# Altium PCB TFT_4.0-inch_OTM8009A_Pcb.PcbDoc
Units mil, origin at the board's own origin, x right, y up, seen from the top; angles counter-clockwise.
Board outline 3937.01 x 2265 mil, 2 copper layers (Top Layer, Bottom Layer); 23 components, 40 nets, 134 pads, 17 vias.
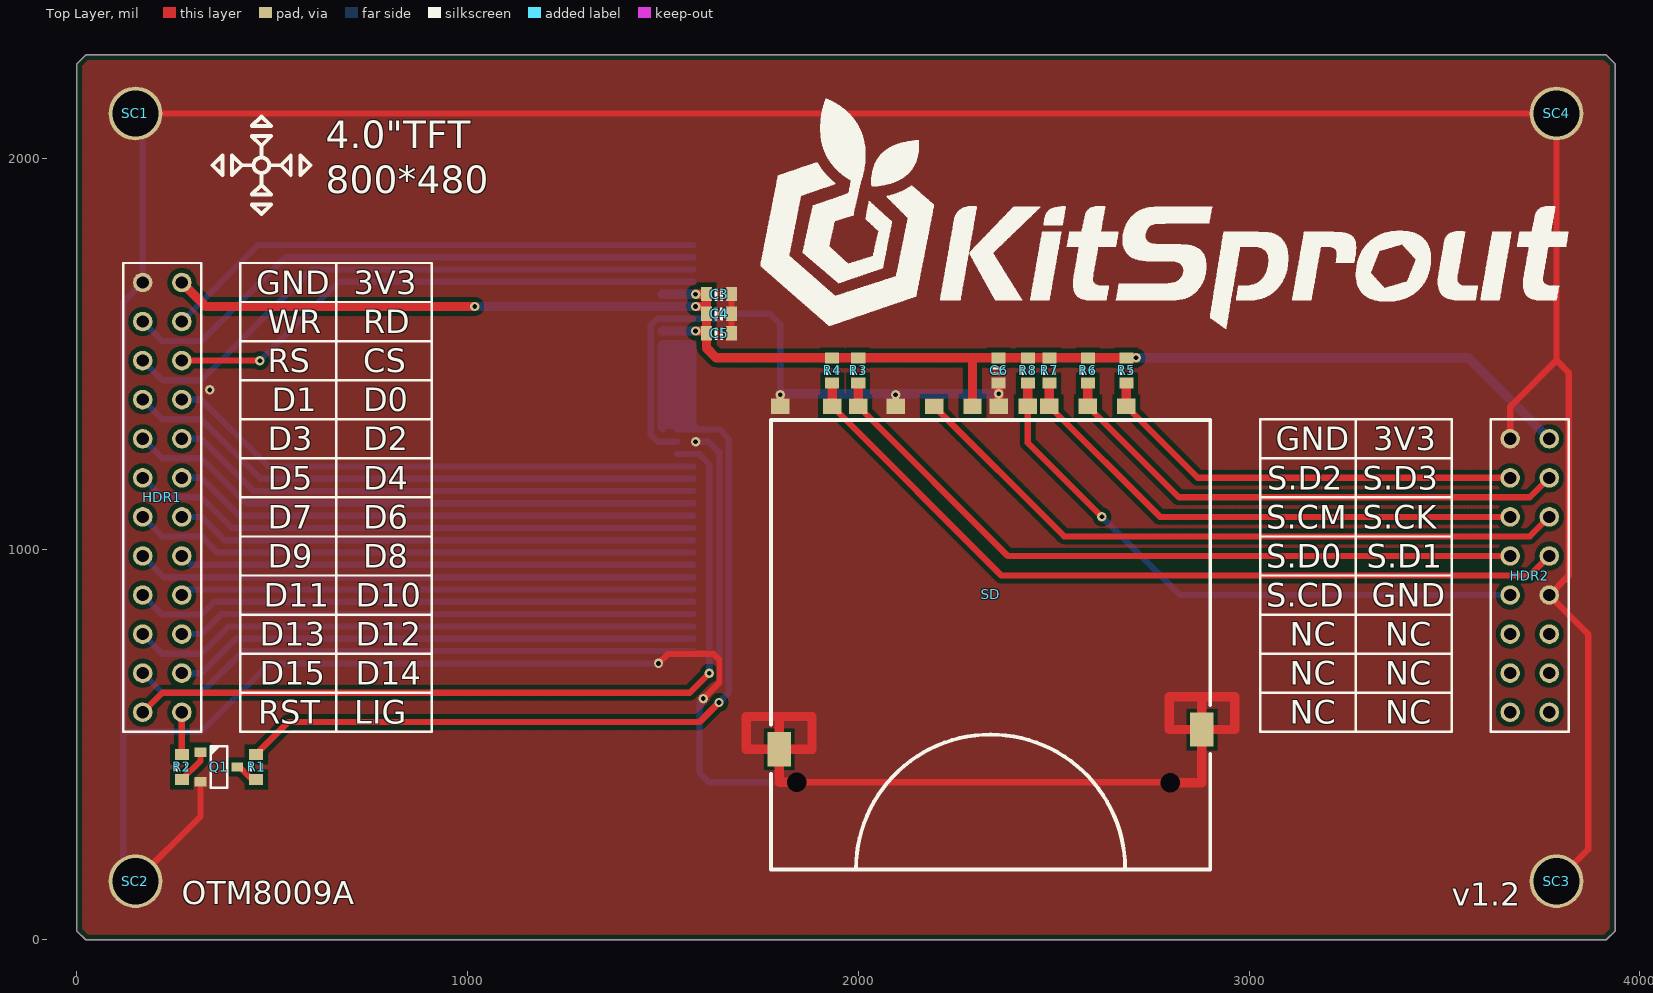
[diagram p0: Top Layer view]
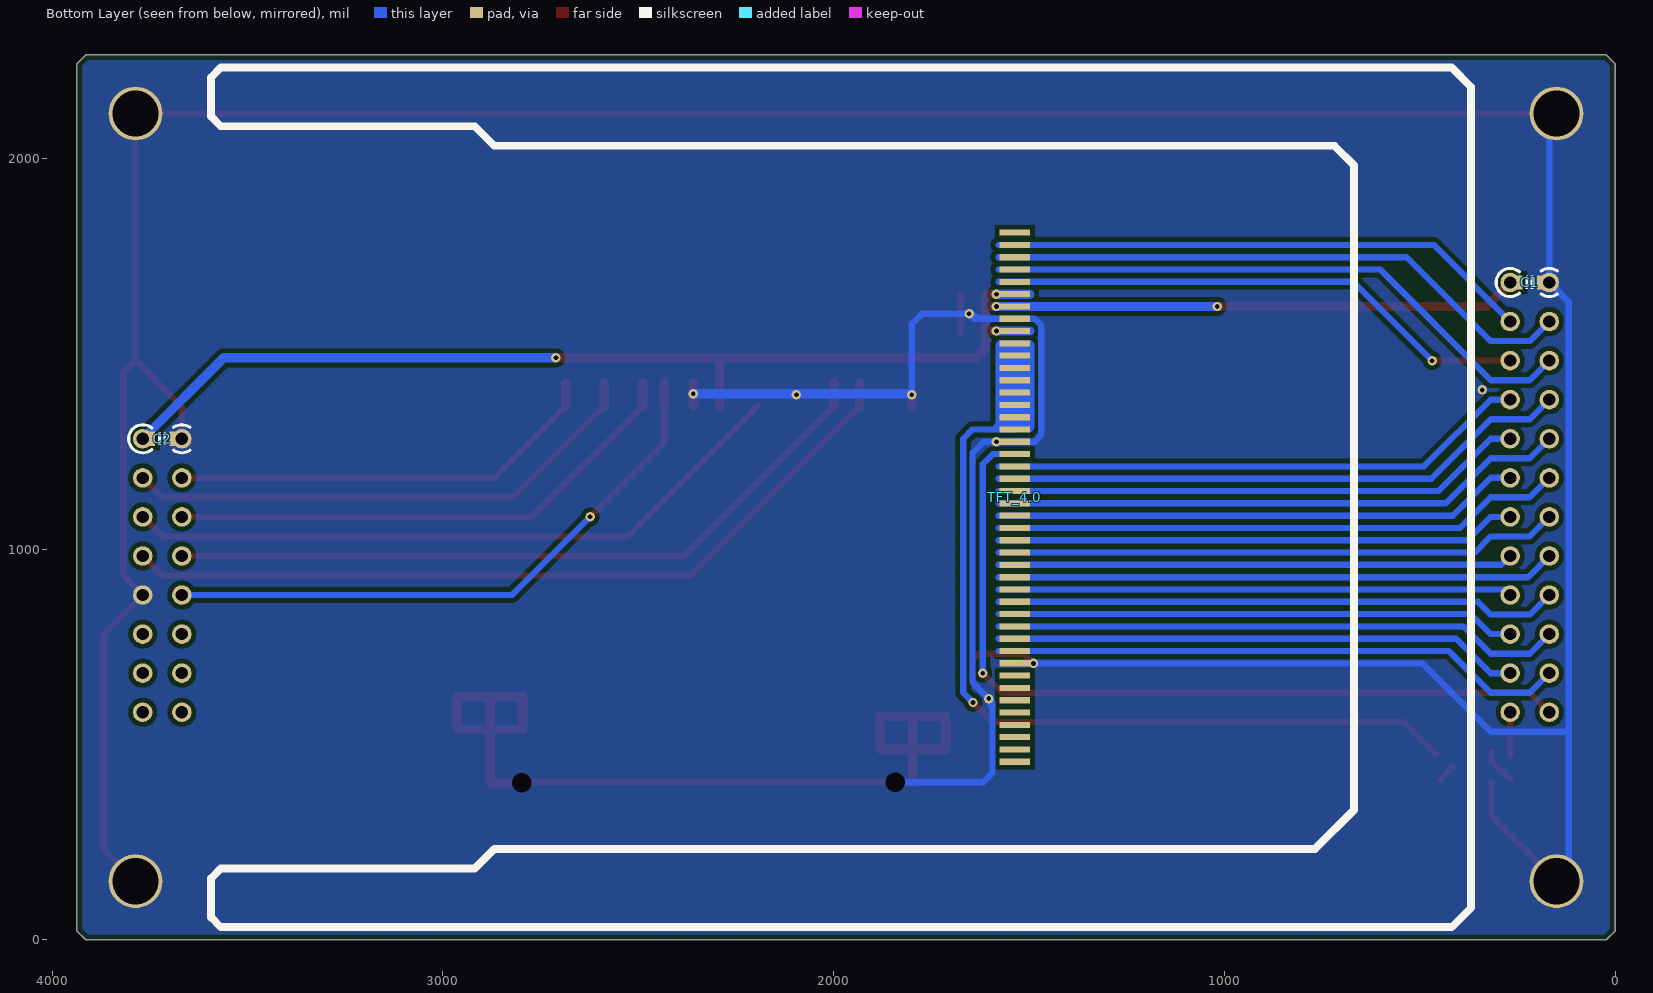
[diagram p1: Bottom Layer view, seen from below]
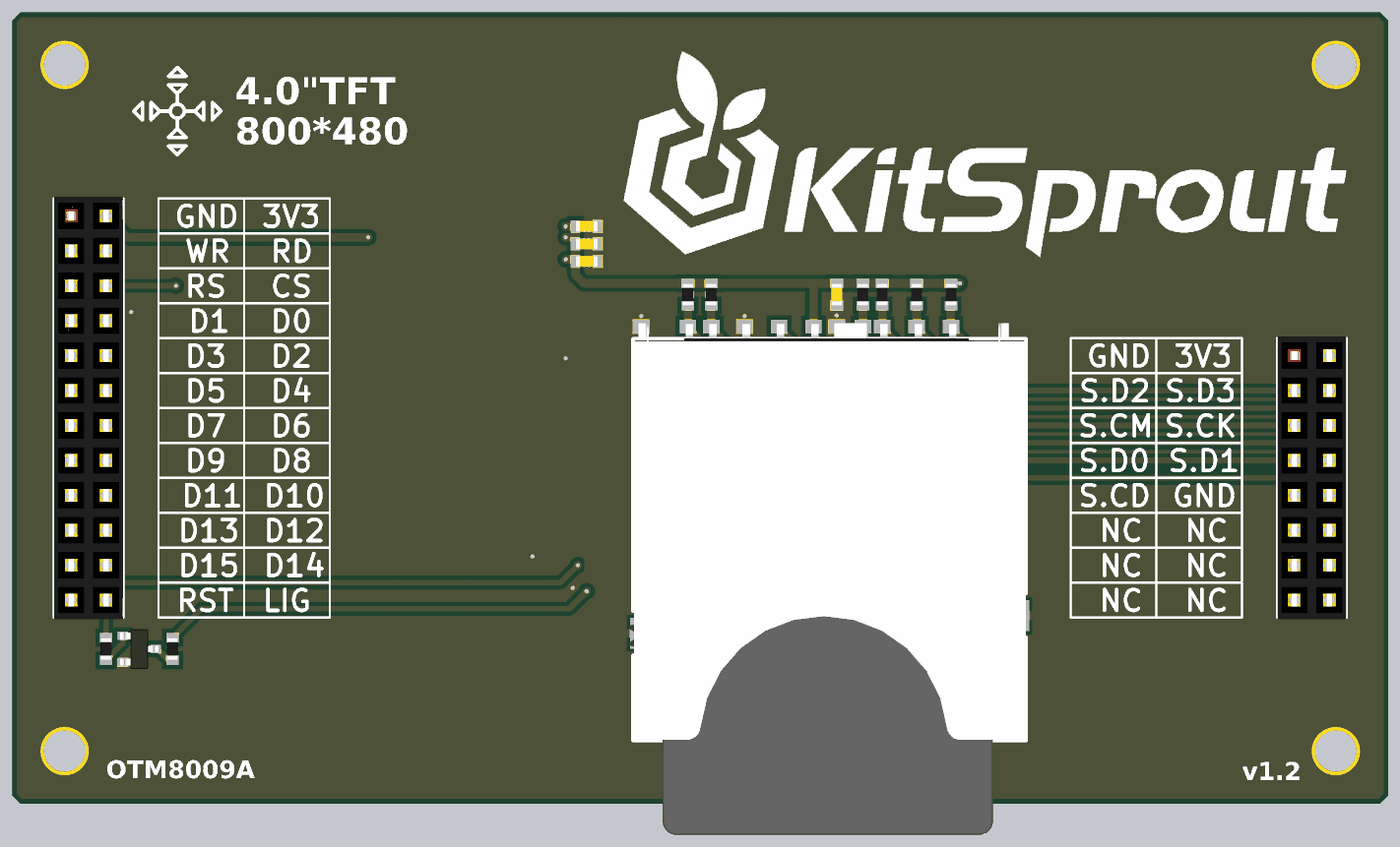
[diagram p2: 3D render of the assembled board from above, using the file's embedded part models]

## Layer stack, top to bottom
Top Solder: solder mask 0.4, Solder Resist, Dk 3.5
Top Layer: signal copper 1.4
Dielectric1: dielectric 12.6, FR-4, Dk 4.8
Bottom Layer: signal copper 1.4
Bottom Solder: solder mask 0.4, Solder Resist, Dk 3.5

## Board outline
0,22.5 22.5,0 3914.51,0 3937.01,22.5 3937.01,2242.5 3914.51,2265 22.5,2265 0,2242.5

## Design rules (kind name [scope] priority, off if disabled: settings)
Clearance ClearancePolygon [InPolygon] p1: gap=12
Clearance [All] p2: gap=6
ComponentClearance [All] p1: gap=0 collisioncheckmode=3 verticalgap=0 showdistances=FALSE
Height [All] p1: minheight=0 maxheight=5000 prefheight=500
HoleSize [All] p1: absolutevalues=TRUE maxlimit=200 minlimit=1 maxpercent=80.000 minpercent=20.000
HoleToHoleClearance [All] p1: gap=6 allowstackedmicrovias=TRUE
MinimumSolderMaskSliver [All] p1: minsoldermaskwidth=6
PlaneConnect [All] p1: planeconnectstyle=Direct reliefexpansion=20 reliefentries=4 reliefconductorwidth=20 reliefairgap=10
PolygonConnect [All] p1: connectstyle=Direct reliefconductorwidth=20 reliefentries=4 polygonreliefangle="90 Angle" airgapwidth=10
RoutingVias [All] p1: holewidth=12 width=20 viastyle="Through Hole" minholewidth=12 minwidth=20 maxholewidth=100 maxwidth=200
SilkToSilkClearance [All] p1: silktosilkclearance=0
SilkToSolderMaskClearance SilkscreenOverComponentPads [IsPad] p1: minsilkscreentomaskgap=1 clearancetoexposedcopper=TRUE
SolderMaskExpansion [All] p1: expansion=1
Width [All] p1: maxlimit=30 minlimit=6 preferedwidth=10
22 further rules are at their usual default settings.

## Components (designator, comment, footprint, x,y, rotation, side; value= is the part's Value field where it differs from the comment)
C1 "Cap_0603" CAP_0603 218.5,1682.5 r0 bottom
C2 "Cap_0603" CAP_0603 3718.5,1282.5 r0 bottom
C3 "Cap_0603" CAP_0603 1643.5,1652.5 r180 top
C4 "Cap_0603" CAP_0603 1643.5,1602.5 r180 top
C5 "Cap_0603" CAP_0603 1643.5,1552.5 r180 top
C6 "Cap_0603" CAP_0603 2359.17,1457.5 r270 top
HDR1 "HDR2x12_2.54" HDR2X12_2.54_180F 168.5,1682.5 r0 top locked
HDR2 "HDR2x8_2.54" HDR2X8_2.54_180F 3668.5,1282.5 r0 top locked
Q1 "BJT_NPN" SOT23-3 363.5,442.5 r0 top
R1 "Res_0603" RES_0603 458.5,442.5 r90 top
R2 "Res_0603" RES_0603 268.5,442.5 r90 top
R3 "Res_0603" RES_0603 1999.92,1457.5 r270 top
R4 "Res_0603" RES_0603 1932.99,1457.5 r270 top
R5 "Res_0603" RES_0603 2685.95,1457.5 r270 top
R6 "Res_0603" RES_0603 2587.52,1457.5 r270 top
R7 "Res_0603" RES_0603 2489.09,1457.5 r270 top
R8 "Res_0603" RES_0603 2433.98,1457.5 r270 top
SC1 "M3" SCRREW_M3 150,2115 r0 top locked
SC2 "M3" SCRREW_M3 150,150 r0 top locked
SC3 "M3" SCRREW_M3 3787.01,150 r0 top locked
SC4 "M3" SCRREW_M3 3787.01,2115 r0 top locked
SD "SD_Card" SD_Card_1 2338.5,704.5 r0 top
TFT_4.0 "TFT_4.0_OTM8009A" TFT_4.0_800x480_OTM8009A 3898.5,2255 r270 bottom locked

## Footprints (in the part's own frame and the unit in brackets; to place one, negate y for a bottom-side part, rotate by r counter-clockwise, add the part's x,y. Pads: shape width x height; smd on the part's side, far side on the other; paste and mask are expansions set on the pad)
CAP_0603 [mil]
  rect 28x36 smd: 1(-32,0) 2(32,0)
  silkscreen extent -10,-16 10,16, body extent -31,-16 31,16, height 36
HDR2X8_2.54_180F [mil]
  round 50 hole 31: 1(0,0) 2(100,0) 3(0,-100) 4(100,-100) 5(0,-200) 6(100,-200) 7(0,-300) 8(100,-300) 9(0,-400) 10(100,-400) 11(0,-500) 12(100,-500) 13(0,-600) 14(100,-600) 15(0,-700) 16(100,-700)
  body extent -48,-755 148,55, height 335
HDR2X12_2.54_180F [mil]
  round 50 hole 31: 1(0,0) 2(100,0) 3(0,-100) 4(100,-100) 5(0,-200) 6(100,-200) 7(0,-300) 8(100,-300) 9(0,-400) 10(100,-400) 11(0,-500) 12(100,-500) 13(0,-600) 14(100,-600) 15(0,-700) 16(100,-700) 17(0,-800) 18(100,-800) 19(0,-900) 20(100,-900) 21(0,-1000) 22(100,-1000) 23(0,-1100) 24(100,-1100)
  body extent -48,-1155 148,55, height 335
RES_0603 [mil]
  rect 28x36 smd: 1(-32,0) 2(32,0)
  silkscreen extent -10,-15 10,16, body extent -31,-16 32,16, height 20
SCRREW_M3 [mm]
  round 3.5 hole 3 mask+0: 0(0,0)
SD_Card_1 [mil]
  rect 47.24x40 smd: 1(249.02,661) 2(150.59,661) 3(20.67,661) 4(-46.26,661) 5(-144.69,661) 6(-243.11,661) 7(-338.58,661) 8(-405.51,661) 9(347.44,661) 10(95.47,661) 11(-538.58,661)
  rect 60x88 smd: 3(-541,-217) 3(541,-166)
  round 40 hole 50 mask+0: 3(-496,-301) 3(460,-302)
  silkscreen extent -562,-524 562,626, body extent -572,-794 562,671, height 104
SOT23-3 [mil]
  rect 30x24 smd: 1(-47,38) 2(-47,-38) 3(47,0)
  silkscreen extent -21,-53 21,53, body extent -55,-57 55,57, height 51
TFT_4.0_800x480_OTM8009A [mm]
  rect 0.4x2 smd: 1(11.3,60) 2(12.1,60) 3(12.9,60) 4(13.7,60) 5(14.5,60) 6(15.3,60) 7(16.1,60) 8(16.9,60) 9(17.7,60) 10(18.5,60) 11(19.3,60) 12(20.1,60) 13(20.9,60) 14(21.7,60) 15(22.5,60) 16(23.3,60) 17(24.1,60) 18(24.9,60) 19(25.7,60) 20(26.5,60) 21(27.3,60) 22(28.1,60) 23(28.9,60) 24(29.7,60) 25(30.5,60) 26(31.3,60) 27(32.1,60) 28(32.9,60) 29(33.7,60) 30(34.5,60) 31(35.3,60) 32(36.1,60) 33(36.9,60) 34(37.7,60) 35(38.5,60) 36(39.3,60) 37(40.1,60) 38(40.9,60) 39(41.7,60) 40(42.5,60) 41(43.3,60) 42(44.1,60) 43(44.9,60) 44(45.7,60)

## Part data
C1 C2 C3 C4 C5 C6: "Capacitor"
HDR1 HDR2: "Header"
Q1: "Transistor"
R1 R2 R3 R4 R5 R6 R7 R8: "Resistor"
SC1 SC2 SC3 SC4: library part Screw_M3, "Screw"
SD: "SD"
TFT_4.0: "TFT"

## Via types
v1: diameter 24, hole 12, Top Layer to Bottom Layer, 17 vias

## Nets (pads, with @x,y where several pads share a name; then routed paths per layer and width w, separated by ;. In a path a pad name is that pad's centre, name@x,y a point inside that pad or via, vN(x,y) a via of type N, cw(c..) or ccw(c..) an arc to the next point about the centre after c; other vN are vias at no path point)
3V3: C1.2 C2.2 C3.2 C4.2 C5.2 C6.1 HDR1.2 HDR2.2 R3.1 R4.1 R5.1 R6.1 R7.1 R8.1 SD.4 TFT_4.0.6 TFT_4.0.7 TFT_4.0.9 | length 4109.5
  Top Layer w24: HDR1.2 329.86,1621.14 v1(1018.5,1621.14) ; v1(1583.5,1558.15) C5.2@1611.5,1558.15 ; v1(1583.5,1621.14) 1611.5,1621.14 ; v1(1583.5,1652.64) C3.2@1611.5,1652.64 ; C3.2 1611.5,1514.5 1636.5,1489.5 R4.1 R3.1 2292.24,1489.5 ; SD.4 2292.24,1489.5 ; v1(2710.95,1489.5) R5.1 R6.1 R7.1 R8.1 C6.1 2292.24,1489.5
  Bottom Layer w24: v1(1018.5,1621.14) v1(1583.5,1621.14) ; TFT_4.0.9@1498.5,1558.15 v1(1583.5,1558.15) ; TFT_4.0.6@1498.5,1652.64 v1(1583.5,1652.64) ; v1(2710.95,1489.5) 3561.5,1489.5 HDR2.2
CS: HDR1.6 TFT_4.0.5 | length 1393.5
  Top Layer w16: HDR1.6 v1(468.5,1482.5)
  Bottom Layer w16: v1(468.5,1482.5) 670.14,1684.13 1578.5,1684.13
D0: HDR1.8 TFT_4.0.20 | length 1380.8
  Bottom Layer w16: HDR1.8 318.5,1382.5 489.31,1211.69 1578.5,1211.69
D1: HDR1.7 TFT_4.0.21 | length 1493.8
  Bottom Layer w16: HDR1.7 218.5,1332.5 318.5,1332.5 470.81,1180.2 1578.5,1180.2
D2: HDR1.10 TFT_4.0.22 | length 1365.4
  Bottom Layer w16: HDR1.10 318.5,1282.5 452.3,1148.7 1578.5,1148.7
D3: HDR1.9 TFT_4.0.23 | length 1478.5
  Bottom Layer w16: HDR1.9 218.5,1232.5 318.5,1232.5 433.8,1117.2 1578.5,1117.2
D4: HDR1.12 TFT_4.0.24 | length 1350.1
  Bottom Layer w16: HDR1.12 318.5,1182.5 415.3,1085.71 1578.5,1085.71
D5: HDR1.11 TFT_4.0.25 | length 1463.1
  Bottom Layer w16: HDR1.11 218.5,1132.5 318.5,1132.5 396.79,1054.21 1578.5,1054.21
D6: HDR1.14 TFT_4.0.26 | length 1334.8
  Bottom Layer w16: HDR1.14 318.5,1082.5 378.29,1022.72 1578.5,1022.72
D7: HDR1.13 TFT_4.0.27 | length 1447.8
  Bottom Layer w16: HDR1.13 218.5,1032.5 318.5,1032.5 359.78,991.22 1578.5,991.22
D8: HDR1.16 TFT_4.0.28 | length 1319.4
  Bottom Layer w16: HDR1.16 291.28,959.72 1578.5,959.72
D9: HDR1.15 TFT_4.0.29 | length 1432.5
  Bottom Layer w16: HDR1.15 222.78,928.23 1578.5,928.23
D10: HDR1.18 TFT_4.0.30 | length 1315.9
  Bottom Layer w16: HDR1.18 282.74,896.73 1578.5,896.73
D11: HDR1.17 TFT_4.0.31 | length 1444.3
  Bottom Layer w16: HDR1.17 218.5,832.5 318.5,832.5 351.24,865.24 1578.5,865.24
D12: HDR1.20 TFT_4.0.32 | length 1331.2
  Bottom Layer w16: HDR1.20 318.5,782.5 369.74,833.74 1578.5,833.74
D13: HDR1.19 TFT_4.0.33 | length 1459.6
  Bottom Layer w16: HDR1.19 218.5,732.5 318.5,732.5 388.25,802.24 1578.5,802.24
D14: HDR1.22 TFT_4.0.34 | length 1346.6
  Bottom Layer w16: HDR1.22 318.5,682.5 406.75,770.75 1578.5,770.75
D15: HDR1.21 TFT_4.0.35 | length 1474.9
  Bottom Layer w16: HDR1.21 218.5,632.5 318.5,632.5 425.26,739.25 1578.5,739.25
GND: C1.1 C2.1 C3.1 C4.1 C5.1 C6.2 HDR1.1 HDR2.1 HDR2.10 Q1.2 SC1.0 SC2.0 SC3.0 SC4.0 SD.3 SD.6 SD.11 TFT_4.0.8 TFT_4.0.18 TFT_4.0.36 | length 15364.2
  Top Layer w16: SC2.0 316.5,316.5 Q1.2 ; SC1.0 SC4.0 3787.01,1483 ; v1(1488.5,707.5) 1513.5,732.5 1628.5,732.5 1644.5,716.5 1644.5,658.5 v1(1603.5,617.5) ; C5.1 C4.1 C3.1 ; SD.3@1842.5,403.5 SD.3@2797.5,403.5 ; HDR2.1 3668.5,1364.5 3686.5,1382.5 3787.01,1483 ; SC3.0 3868.5,231.5 3868.5,782.5 HDR2.10 3818.5,932.5 3818.5,1451.51 3787.01,1483
  Top Layer w24: SD.11 v1(1799.92,1395.5) ; SD.3@1842.5,403.5 1797.5,403.5 SD.3@1797.5,487.5 ; SD.3@2359.17,1365.5 v1(2359.17,1397.5) C6.2 ; SD.3@2798.5,402.5 2879.5,402.5 SD.3@2879.5,538.5 ; SD.3@1797.5,487.5 1797.5,571.5 ; SD.3@1797.5,487.5 1713.5,487.5 1713.5,571.5 1797.5,571.5 ; SD.3@1797.5,487.5 1881.5,487.5 1881.5,571.5 1797.5,571.5 ; SD.3@2879.5,538.5 2963.5,538.5 2963.5,622.5 2879.5,622.5 ; SD.3@2879.5,538.5 2879.5,622.5 ; SD.3@2879.5,538.5 2795.5,538.5 2795.5,622.5 2879.5,622.5
  Bottom Layer w16: SC2.0@118.5,150 118.5,532.5 ; SC1.0@168.5,2115 HDR1.1 118.5,1632.5 118.5,532.5 ; v1(1488.5,707.5) 493.5,707.5 318.5,532.5 118.5,532.5 ; TFT_4.0.18 1486.32,1274.68 1468.5,1292.5 1468.5,1572.5 1485.65,1589.65 TFT_4.0.8 1640.65,1589.65 v1(1653.5,1602.5) 1773.5,1602.5 1799.92,1576.08 v1(1799.92,1395.5) ; v1(1583.5,1274.69) 1616.32,1274.69 1644.5,1246.5 1644.5,658.5 v1(1603.5,617.5) 1593.5,607.5 1593.5,427.5 1617.5,403.5 SD.3@1842.5,403.5 ; 1593.5,583.7 cw(c1637.3,583.7) v1@1606.33,614.67 ; 1612.81,1589.65 ccw(c1612.81,1643.19) v1@1650.68,1605.33
  Bottom Layer w24: v1@1801.92,1397.5 v1(2359.17,1397.5)
  other v1: 2095.39,1395.5 340.43,1407.5
LEDK: R1.2 TFT_4.0.10 TFT_4.0.11 TFT_4.0.12 TFT_4.0.13 TFT_4.0.14 TFT_4.0.15 TFT_4.0.16 TFT_4.0.17 | length 2596.2
  Top Layer w16: R1.2 541.5,557.5 1593.5,557.5 v1(1643.5,607.5)
  Bottom Layer w16: TFT_4.0.17@1499.82,1306.18 1493.5,1312.5 1493.5,1522.5 1497.66,1526.65 1574.35,1526.65 1578.5,1522.5 1578.5,1318.24 1590.56,1306.18 ; TFT_4.0.17 1644.82,1306.18 1668.5,1282.5 1668.5,632.5 v1(1643.5,607.5)
LIG: HDR1.24 R2.2 | length 108
  Top Layer w16: R2.2 HDR1.24
NetHDR2_11: HDR2.11
NetHDR2_12: HDR2.12
NetHDR2_13: HDR2.13
NetHDR2_14: HDR2.14
NetHDR2_15: HDR2.15
NetHDR2_16: HDR2.16
NetQ1_1: Q1.1 R2.1 | length 89.9
  Top Layer w16: R2.1 316.5,458.5 Q1.1
NetQ1_3: Q1.3 R1.1 | length 45.3
  Top Layer w16: Q1.3@415.5,442.5 R1.1@447.5,410.5
RD: HDR1.4 TFT_4.0.2 | length 1391.2
  Bottom Layer w16: HDR1.4 464.63,1778.62 1578.5,1778.62
RS: HDR1.5 TFT_4.0.4 | length 1548
  Bottom Layer w16: HDR1.5 218.5,1432.5 318.5,1432.5 601.63,1715.63 1578.5,1715.63
RST: HDR1.23 TFT_4.0.19 | length 2119.3
  Top Layer w16: HDR1.23 218.5,632.5 1568.5,632.5 v1(1618.5,682.5)
  Bottom Layer w16: TFT_4.0.19 1592.82,1243.19 1618.5,1217.5 v1(1618.5,682.5)
SD_CD: HDR2.9 R8.2 SD.10 | length 1549.3
  Top Layer w16: SD.10 2433.98,1272.03 v1(2623.5,1082.5)
  Top Layer w24: SD.10 R8.2
  Bottom Layer w16: v1(2623.5,1082.5) 2823.5,882.5 HDR2.9
SD_CM: HDR2.5 R7.2 SD.2 | length 1356.6
  Top Layer w16: SD.2 2772.09,1082.5 HDR2.5
  Top Layer w24: SD.2 R7.2
SD_D0: HDR2.7 R3.2 SD.7 | length 1887.2
  Top Layer w16: SD.7 2382.92,982.5 HDR2.7
  Top Layer w24: SD.7 R3.2
SD_D1: HDR2.8 R4.2 SD.8 | length 2095.6
  Top Layer w16: SD.8 2365.99,932.5 3718.5,932.5 HDR2.8
  Top Layer w24: SD.8 R4.2
SD_D2: HDR2.3 R5.2 SD.9 | length 1118.4
  Top Layer w16: SD.9 2868.94,1182.5 HDR2.3
  Top Layer w24: SD.9 R5.2
SD_D3: HDR2.4 R6.2 SD.1 | length 1358.2
  Top Layer w16: SD.1 2820.52,1132.5 3718.5,1132.5 HDR2.4
  Top Layer w24: SD.1 R6.2
SD_SCK: HDR2.6 SD.5 | length 1733.3
  Top Layer w16: SD.5 2526.82,1032.5 3718.5,1032.5 HDR2.6
WR: HDR1.3 TFT_4.0.3 | length 1519.6
  Bottom Layer w16: HDR1.3 218.5,1532.5 318.5,1532.5 533.13,1747.13 1578.5,1747.13
pads on no net: TFT_4.0.1 TFT_4.0.37 TFT_4.0.38 TFT_4.0.39 TFT_4.0.40 TFT_4.0.41 TFT_4.0.42 TFT_4.0.43 TFT_4.0.44

## Polygon pours and split planes (outlines as drawn)
GND on Top Layer "Mechanical 1-No Net" (hatched 90Degree grid 2 track 4, remove dead copper, pour order 4): 0,2265 3937.01,2265 3937.01,0 0,0
GND on Bottom Layer "Mechanical 1-No Net" (hatched 90Degree grid 2 track 4, remove dead copper, pour order 3): 0,2265 3937.01,2265 3937.01,0 0,0

## Keep-outs
Keep-Out Layer:
  the board outline again, w2

## Other copper
Top Layer:
  pour cut-out: 1756,542.5 1838.5,542.5 1838.5,432.5 1756,432.5
  pour cut-out: 2838.5,592.5 2921,592.5 2921,482.5 2838.5,482.5
Bottom Layer:
  region net LEDK: 1498.5,1527.5 1578.5,1527.5 1578.5,1307.5 1498.5,1307.5

## Silkscreen, mask and mechanical layers (free items; w line width, h text height)
Top Overlay:
  drawing of 5096 lines, arcs and shapes, not listed
  text "4.0\"TFT" at 637.43,2002.5 h120
  text "800*480" at 637.43,1887.5 h120
  text "GND" at 458.5,1652.45 h60
  text "3V3" at 708.5,1652.45 h60
  text "WR" at 488.5,1552.45 h60
  text "RD" at 733.5,1552.45 h60
  text "RS" at 488.5,1452.45 h60
  text "CS" at 733.5,1452.45 h60
  text "D1" at 498.5,1352.45 h60
  text "D0" at 733.5,1352.45 h60
  text "D3" at 488.5,1252.45 h60
  text "D2" at 733.5,1252.45 h60
  text "GND" at 3068.5,1252.5 h60
  text "3V3" at 3317.5,1252.5 h60
  text "D5" at 488.5,1152.45 h60
  text "D4" at 733.5,1152.45 h60
  text "S.D2" at 3046.5,1152.5 h60
  text "S.D3" at 3291.5,1152.5 h60
  text "D7" at 488.5,1052.45 h60
  text "D6" at 733.5,1052.45 h60
  text "S.CM" at 3043.5,1052.5 h60
  text "S.CK" at 3290.5,1052.5 h60
  text "D9" at 488.5,952.45 h60
  text "D8" at 733.5,952.45 h60
  text "S.D0" at 3044.5,952.5 h60
  text "S.D1" at 3301.5,952.5 h60
  text "D11" at 478.5,852.45 h60
  text "D10" at 713.5,852.45 h60
  text "S.CD" at 3044.5,852.5 h60
  text "GND" at 3313.5,852.5 h60
  text "D13" at 468.5,752.45 h60
  text "D12" at 713.5,752.45 h60
  text "NC" at 3104.5,752.5 h60
  text "NC" at 3348.5,752.5 h60
  text "D15" at 468.5,652.45 h60
  text "D14" at 713.5,652.45 h60
  text "NC" at 3104.5,652.5 h60
  text "NC" at 3348.5,652.5 h60
  text "RST" at 464.5,552.45 h60
  text "LIG" at 710.5,552.45 h60
  text "NC" at 3104.5,552.5 h60
  text "NC" at 3348.5,552.5 h60
  text "OTM8009A" at 268.5,72.5 h100
  text "v1.2" at 3518.5,67.5 h100
Bottom Overlay:
  lines w8: 147.67,1653.14 ccw(c168.5,1682.5) 189.15,1653.01 ; 147.86,1711.99 cw(c168.5,1682.5) 189.34,1711.86 ; 245.36,1654.92 ccw(c268.5,1682.5) 245.36,1710.08 ; 3647.67,1253.14 ccw(c3668.5,1282.5) 3689.15,1253.01 ; 3647.86,1311.99 cw(c3668.5,1282.5) 3689.34,1311.86 ; 3745.36,1254.92 ccw(c3768.5,1282.5) 3745.36,1310.08
  lines w20: 368.5,82.5 418.5,32.5 3568.5,32.5 3593.5,57.5 3593.5,157.5 3568.5,182.5 2918.5,182.5 2868.5,232.5 768.5,232.5 668.5,332.5 668.5,1982.5 718.5,2032.5 2868.5,2032.5 2918.5,2082.5 3568.5,2082.5 3593.5,2107.5 3593.5,2207.5 3568.5,2232.5 418.5,2232.5 368.5,2182.5 368.5,82.5
Mechanical 1:
  the board outline again, w2
Drill Drawing:
  text ".Legend" at 4085,40 h60

## Dimensions
0,2242.5 to 3937.01,2242.5 on Mechanical 13
3914.51,2265 to 3914.51,0 on Mechanical 13